# EAGLE board lv2-battery (EAGLE 4.09)
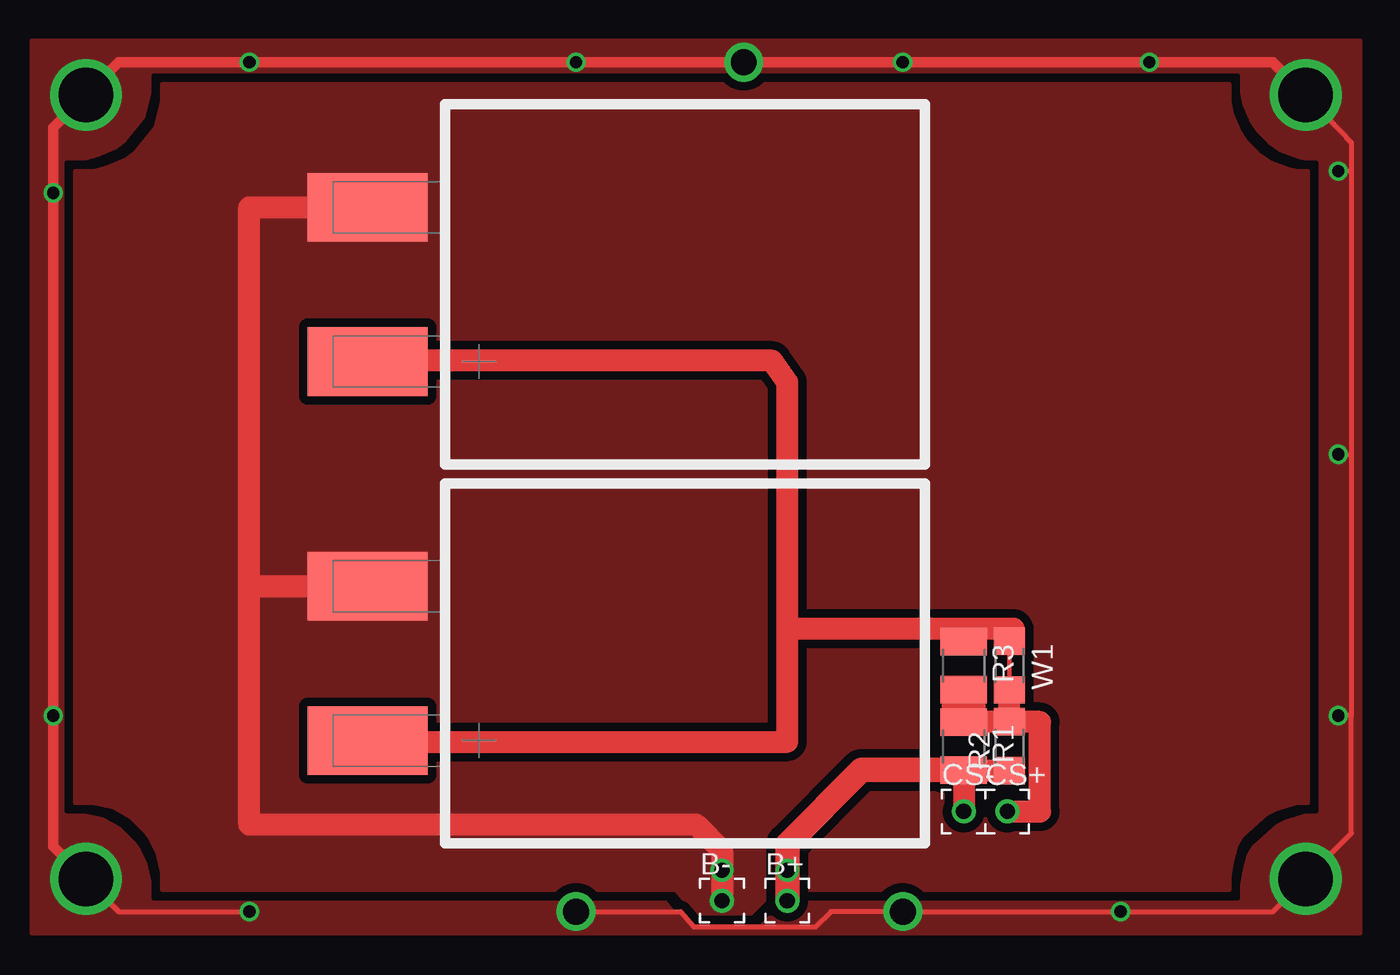
[diagram p0: board, top side]
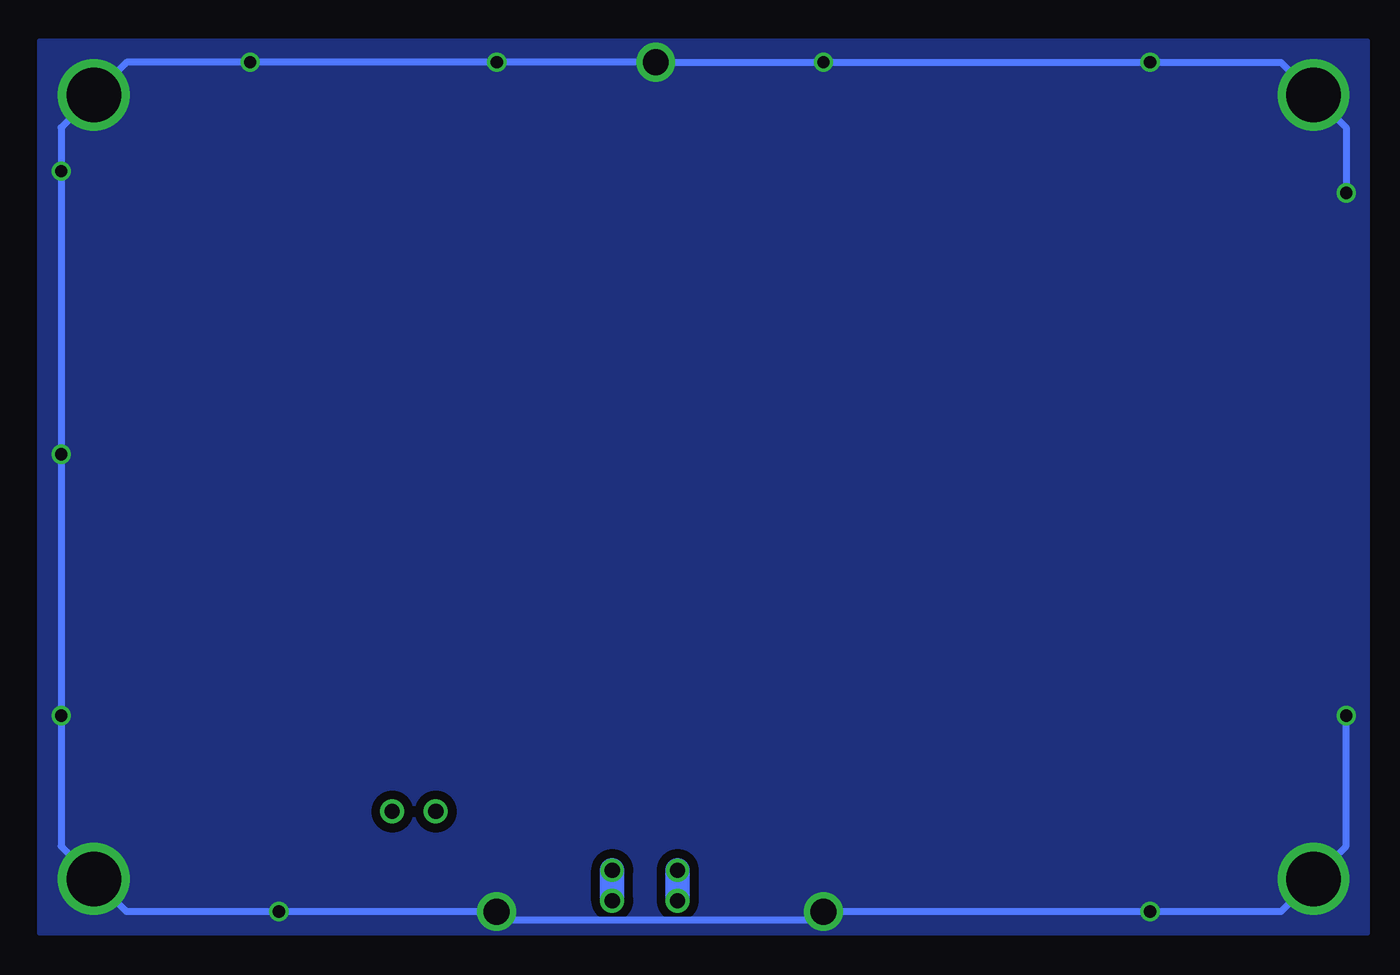
[diagram p1: board, bottom side, seen from below]

No outline drawn. Coordinates in mm, seen from the top.
Copper layers used: Top, Bottom
tRestrict: 2 lines

## Footprints (pad centres in the part's own frame; a part is rotated, then mirrored left to right if it is on the bottom)
SYE-301P = smd 7 x 4: + -18.5,-4.5; - -18.5,4.5
PAD_ROUND_APC-FREE_0.1/035 = drill 0.889 round: PAD 0,0
R1210 = smd 1.6 x 2.7: 1 -1.4,0; 2 1.4,0
R1206 = smd 1.6 x 1.803: 1 -1.422,0; 2 1.422,0
ZJ-1206 = smd 1.6 x 1.803: 1 -1.422,0; 2 1.422,0

## Placement (x,y rotation side)
B400A  BATTERY_SYE-301P  [SYE-301P]  38.1,15.75 0 top
B400B  BATTERY_SYE-301P  [SYE-301P]  38.1,37.85 0 top
B+  3.6V  [PAD_ROUND_APC-FREE_0.1/035]  44.07,1.91 0 top
B-  0V  [PAD_ROUND_APC-FREE_0.1/035]  40.26,1.91 0 top
CS+  [PAD_ROUND_APC-FREE_0.1/035]  56.9,7.11 0 top
CS-  [PAD_ROUND_APC-FREE_0.1/035]  54.36,7.11 0 top
R1  [R1210]  54.36,10.92 270 top
R2  [R1206]  57.02,10.92 90 top
R3  [R1210]  54.36,15.62 270 top
W1  JUMPER_ZEROOHM1206  [ZJ-1206]  57.02,15.62 270 top

## Library data of the parts
B400A B400B B+ B- CS+ CS- W1 = psas_eagle_library
R1-R3 = rcl

## Nets
ANODE: B400A.+ B400B.+ R3.1 W1.1
B+: B+.PAD CS-.PAD R1.2 R2.1
B-: B400A.- B400B.- B-.PAD
FUSED: CS+.PAD R1.1 R2.2 R3.2 W1.2

## Tracks (layer width: path | path; a pad name or v marks a point on that pad's centre or on a via)
ANODE
  Top 1.27: 44.07,12.32 44.07,11.18 20.93,11.18 B400A.+ | 44.07,12.32 44.07,17.78 | 44.07,17.78 44.07,32.13 43.18,33.4 21.04,33.4 B400B.+ | 44.07,12.32 | 57.02,17.78 W1.1 | 57.02,17.78 57.28,17.78 | 44.07,17.78 54.36,17.78 | 54.36,17.78 57.02,17.78 | 54.36,17.78 R3.1
B+  (via drill 0.89)
  Top 1.27: R1.2 54.36,9.5 R2.1 R1.2 | R1.2 CS-.PAD
  Top 1.422: B+.PAD v44.07,3.68 44.07,5.21 48.38,9.52 R1.2
  Bottom 1.422: B+.PAD v44.07,3.68
B-  (via drill 0.89)
  Top 1.27: B400B.- 12.7,42.35 12.7,20.25 | 12.7,20.25 B400A.- | 12.7,20.25 12.7,6.35 38.73,6.35 40.26,4.83 v40.26,3.68 B-.PAD
  Bottom 1.422: v40.26,3.68 B-.PAD
  pour Top (isolate 0.508, no thermals): 2.54,7.62 2.54,24.64 2.54,38.1 2.54,44.45 3.68,44.45 4.57,44.7 5.46,45.09 6.1,45.59 7.24,46.99 7.62,48.51 7.62,49.53 69.85,49.53 69.85,48.51 69.98,47.75 70.36,46.86 70.87,46.1 71.5,45.47 72.26,44.96 73.28,44.58 73.79,44.45 74.42,44.45 74.42,40.64 74.42,29.46 74.42,26.04 74.42,15.11 74.42,7.62 73.79,7.62 72.52,7.24 72.01,6.99 70.61,5.71 70.23,5.08 69.98,4.19 69.85,3.3 69.85,2.54 43.31,2.54 41.66,0.89 38.99,0.89 37.59,2.54 7.62,2.54 7.62,3.56 7.37,4.7 6.99,5.46 6.6,5.97 5.84,6.73 4.7,7.37 3.56,7.62
CHASSIS  (via drill 0.71, 1.51, 3.17)
  Top 0.305: 76.96,44.45 76.96,46.1 v74.3,48.9 | 76.96,44.45 76.96,27.94 | 76.96,27.94 76.96,12.7 | 76.96,12.7 76.96,5.84 72.39,1.27 v50.8,1.27 | v50.8,1.27 50.67,1.27 | v50.8,1.27 46.61,1.27 45.72,0.38 38.61,0.38 37.85,1.27 v31.75,1.27 | v3.17,3.17 5.08,1.27 v12.7,1.27 | 76.96,12.7 v76.2,12.7 | v76.2,27.94 76.96,27.94 | 76.96,44.45 v76.2,44.45
  Top 0.61: v3.17,3.17 1.27,5.08 1.27,46.99 5.08,50.8 v41.53,50.8 72.39,50.8 v74.3,48.9
  Bottom 0.406: v1.27,12.7 1.27,5.08 v3.17,3.17 5.08,1.27 v12.7,1.27 v31.75,1.27 32.26,0.76 50.29,0.76 v50.8,1.27 v63.5,1.27 72.39,1.27 v74.3,3.17 76.2,5.08 v76.2,12.7 v76.2,27.94 v76.2,44.45 76.2,46.99 v74.3,48.9 72.39,50.8 v65.18,50.8 v50.8,50.8 v41.53,50.8 v31.75,50.8 v12.7,50.8 5.08,50.8 v3.17,48.9 1.27,46.99 v1.27,43.18
  pour Bottom (isolate 0.508, rank 2, no thermals): 0,0 77.47,0 77.47,52.07 0,52.07
  pour Top (isolate 0.508, rank 2, no thermals): 0,0 0,52.07 77.47,52.07 77.47,0
FUSED
  Top 1.27: R1.1 54.36,12.34 | R2.2 54.36,12.34 | CS+.PAD 58.8,7.11 58.8,12.32 57.02,12.32 R2.2 | 54.36,12.34 53.72,12.34 53.72,13.21 54.36,13.21 | 54.36,13.21 54.99,13.21 | 54.36,13.21 R3.2 | R2.2 W1.2